# EAGLE board MOL-v2-0 (EAGLE 8.2.2)

Size 88.88 x 68.25 mm. Coordinates in mm from the lower left corner, seen from the top.
Outline: 0,0 88.88,0 88.88,68.25 0,68.25 0,0
Copper layers (1*16): Top 0.035559375mm / dielectric 1.501140625mm / Bottom 0.035559375mm
Design rules "typical_4pcb": minimum track width 10mil, minimum drill 15mil, track to track 6mil, track to pad 6mil, pad to pad 6mil, via to via 6mil, smd to smd 6mil, copper to edge 15mil, drill to drill 8mil, minimum pad ring 10mil, minimum via ring 8mil, stop-mask expansion 4mil, vias tented up to drill 0mil, thermal gap 10mil
Net classes: 2 Power: width 0.381 mm, clearance 0.279 mm; 3 Analog Sig: width 0.381 mm, clearance 0.279 mm

## Footprints (pad centres in the part's own frame; a part is rotated, then mirrored left to right if it is on the bottom)
2X5-SHROUDED_LOCK = drill 1.016 pad 1.88: 1 -1.397,5.08; 2 1.397,5.08; 3 -1.397,2.54; 4 1.397,2.54; 5 -1.397,0; 6 1.397,0; 7 -1.397,-2.54; 8 1.397,-2.54; 9 -1.397,-5.08; 10 1.397,-5.08
1X03_NO_SILK = drill 1.016 pad 1.524: 1 0,0; 2 2.54,0; 3 5.08,0
DIL18 = drill 0.813 long: 1 -10.16,-3.81; 2 -7.62,-3.81; 3 -5.08,-3.81; 4 -2.54,-3.81; 5 0,-3.81; 6 2.54,-3.81; 7 5.08,-3.81; 8 7.62,-3.81; 9 10.16,-3.81; 10 10.16,3.81; 11 7.62,3.81; 12 5.08,3.81; 13 2.54,3.81; 14 0,3.81; 15 -2.54,3.81; 16 -5.08,3.81; 17 -7.62,3.81; 18 -10.16,3.81
1X03_LOCK@1 = drill 1.016 pad 1.88: 1 0,0.127; 2 2.54,-0.127; 3 5.08,0.127
1X05_LOCK = drill 1.016 pad 1.88: 1 0,0.127; 2 2.54,-0.127; 3 5.08,0.127; 4 7.62,-0.127; 5 10.16,0.127
TRIM-PCB-9MM = drill 0.9 pad 1.778: 1 -2.54,-7.5; 2 0,-7.5; 3 2.54,-7.5 | drill 2.845 pad 4: 5 -4.8,0; M2 4.8,0
DCJACK_2MM_PTH = drill 2.8: GND 0,7.35; GNDBREAK 4.8,10.75 | drill 3.2: PWR 0,13.6
RESISTOR-NET-8P-DIL16 = drill 0.813 pad 1.422: A1 -8.89,-3.81; A2 -8.89,3.81; B1 -6.35,-3.81; B2 -6.35,3.81; C1 -3.81,-3.81; C2 -3.81,3.81; D1 -1.27,-3.81; D2 -1.27,3.81; E1 1.27,-3.81; E2 1.27,3.81; F1 3.81,-3.81; F2 3.81,3.81; G1 6.35,-3.81; G2 6.35,3.81; H1 8.89,-3.81; H2 8.89,3.81
TR2-SWITCH-MOMENTARY-LED = drill 0.8 pad 1.676: 1 2.54,-2.54; 2 2.54,2.54; 3 -2.54,-2.54; 4 -2.54,2.54; A 0,2.54; C 0,-2.54
T36 = drill 1: 0 -15.24,-5.08; 1 -12.7,-5.08; 2 -10.16,-5.08; 3 -7.62,-5.08; 3V3(1) 17.78,-5.08; 3V3(2) 27.94,0; 3V3(3) -12.7,10.16; 3V3(4) 40.64,5.08; 4 -5.08,-5.08; 5 -2.54,-5.08; 5V -11.43,-1.905; 6 0,-5.08; 7 2.54,-5.08; 8 5.08,-5.08; 9 7.62,-5.08; 10 10.16,-5.08; 11 12.7,-5.08; 12 15.24,-5.08; 13 15.24,10.16; 14 12.7,10.16; 15 10.16,10.16; 16 7.62,10.16; 17 5.08,10.16; 18 2.54,10.16; 19 0,10.16; 20 -2.54,10.16; 21 -5.08,10.16; 22 -7.62,10.16; 23 -10.16,10.16; 24 20.32,-5.08; 25 22.86,-5.08; 26 25.4,-5.08; 27 27.94,-5.08; 28 30.48,-5.08; 29 33.02,-5.08; 30 35.56,-5.08; 31 38.1,-5.08; 32 40.64,-5.08; 33 40.64,10.16; 34 38.1,10.16; 35 35.56,10.16; 36 33.02,10.16; 37 30.48,10.16; 38 27.94,10.16; 39 25.4,10.16; 40 20.32,2.54; 41 22.86,2.54; 42 25.4,2.54; 43 30.48,2.54; 44 33.02,2.54; 45 35.56,2.54; 46 38.1,2.54; 47 38.1,5.08; 48 35.56,5.08; 49 33.02,5.08; 50 30.48,5.08; 51 25.4,5.08; 52 22.86,5.08; 53 20.32,5.08; 54 5.08,5.08; 55 2.54,5.08; 56 0,5.08; 57 -2.54,5.08; A10 -7.62,7.62; A11 -5.08,7.62; AGND -15.24,10.16; AREF -10.16,7.62; D+ -6.35,-1.905; D- -8.89,-1.905; DAC0 22.86,10.16; DAC1 20.32,10.16; DC 2.54,2.54; DD 5.08,2.54; DE 0,2.54; G1 27.94,2.54; G2 17.78,10.16; G3 40.64,2.54; G4 -3.81,-1.905; G5 -1.27,-1.905; G6 -2.54,2.54; P 27.94,5.08; R 27.94,7.62; VBAT 27.94,-2.54; VIN -17.78,10.16; VUSB -15.24,7.62 | drill 1 square: G0 -17.78,-5.08

## Placement (x,y rotation side)
ACTUATORS  [2X5-SHROUDED_LOCK]  71.12,26.67 180 bottom
AN-IN-1  [1X03_NO_SILK]  86.23,9.27 90 bottom
AN-IN-2  [1X03_NO_SILK]  70.87,11.3 0 bottom
AN-IN-3  [1X03_NO_SILK]  46.74,11.3 0 bottom
AN-IN-4  [1X03_NO_SILK]  21.34,11.3 0 bottom
IC1  ULN2803  [DIL18]  26.67,39.37 0 bottom
IC2  ULN2803  [DIL18]  54.61,39.37 0 bottom
J1  Servo1  [1X03_LOCK@1]  82.55,37.72 90 bottom
J2  Servo2  [1X03_LOCK@1]  85.09,37.72 90 bottom
JOY1  [1X05_LOCK]  85.09,55.88 270 bottom
JOY2  [1X05_LOCK]  2.54,44.45 90 bottom
KNOB1  [TRIM-PCB-9MM]  7.24,5.08 180 top
KNOB2  [TRIM-PCB-9MM]  31.75,5.08 180 top
KNOB3  [TRIM-PCB-9MM]  55.88,5.08 180 top
KNOB4  [TRIM-PCB-9MM]  79.88,4.83 180 top
POWER-5V  [DCJACK_2MM_PTH]  91.44,21.59 270 bottom
RN1  330  [RESISTOR-NET-8P-DIL16]  27.94,50.8 0 bottom
RN2  330  [RESISTOR-NET-8P-DIL16]  53.34,50.8 0 bottom
S5  SW-LEDPTH  [TR2-SWITCH-MOMENTARY-LED]  19.94,5.08 0 top
S6  SW-LEDPTH  [TR2-SWITCH-MOMENTARY-LED]  44.45,5.08 0 top
S7  SW-LEDPTH  [TR2-SWITCH-MOMENTARY-LED]  68.58,5.08 0 top
S8  SW-LEDPTH  [TR2-SWITCH-MOMENTARY-LED]  82.55,31.75 0 top
STRIP1  [2X5-SHROUDED_LOCK]  8.89,45.72 0 bottom
STRIP2  [2X5-SHROUDED_LOCK]  76.2,62.23 90 bottom
STRIP3  [2X5-SHROUDED_LOCK]  54.61,62.23 90 bottom
STRIP4  [2X5-SHROUDED_LOCK]  33.02,62.23 90 bottom
STRIP5  [2X5-SHROUDED_LOCK]  11.43,62.23 90 bottom
STRIP6  [2X5-SHROUDED_LOCK]  74.93,46.99 180 bottom
U$2  TEENSY3_6--ALLPINS  [T36]  19.05,26.67 180 bottom

## Library data of the parts
ACTUATORS STRIP1-STRIP6 = SparkFun-Connectors; PROD_ID: CONN-08671; SF_ID: PRT-08506
AN-IN-1-AN-IN-4 J1 J2 JOY1 JOY2 = SparkFun-Connectors
IC1 IC2 = uln-udn
KNOB1-KNOB4 S5-S8 = Daniel
POWER-5V = adafruit
RN1 RN2 U$2 = CMU-ArtFab

## Nets
+3V3: ACTUATORS.9 AN-IN-1.1 AN-IN-2.1 AN-IN-3.1 AN-IN-4.1 JOY1.2 JOY2.2 KNOB1.1 KNOB2.1 KNOB3.1 KNOB4.1 STRIP1.9 STRIP2.9 STRIP3.9 STRIP4.9 STRIP5.9 STRIP6.9 U$2.3V3(1) U$2.3V3(2) U$2.3V3(3) U$2.3V3(4)
+5V [Power]: ACTUATORS.7 ACTUATORS.8 IC1.10 IC2.10 J1.2 J2.2 POWER-5V.PWR
AGND [Analog Sig]: AN-IN-1.3 AN-IN-2.3 AN-IN-3.3 AN-IN-4.3 JOY1.1 JOY2.1 KNOB1.3 KNOB2.3 KNOB3.3 KNOB4.3 STRIP1.8 STRIP2.8 STRIP3.8 STRIP4.8 STRIP5.8 STRIP6.8 U$2.AGND
AN1 [Analog Sig]: STRIP1.1 U$2.15
AN2 [Analog Sig]: STRIP1.2 U$2.16
AN3 [Analog Sig]: STRIP2.1 U$2.14
AN4 [Analog Sig]: STRIP2.2 U$2.33
AN5 [Analog Sig]: AN-IN-1.2 STRIP3.1 U$2.34
AN6 [Analog Sig]: AN-IN-2.2 STRIP3.2 U$2.35
AN7 [Analog Sig]: AN-IN-3.2 STRIP4.1 U$2.39
AN8 [Analog Sig]: AN-IN-4.2 STRIP4.2 U$2.36
AN9 [Analog Sig]: KNOB1.2 STRIP5.1 U$2.DAC0
AN10 [Analog Sig]: KNOB2.2 STRIP5.2 U$2.DAC1
AN11 [Analog Sig]: KNOB3.2 STRIP6.1 U$2.A10
AN12 [Analog Sig]: KNOB4.2 STRIP6.2 U$2.A11
B1: STRIP1.3 U$2.12
B2: STRIP1.4 U$2.11
B3: STRIP2.3 U$2.28
B4: STRIP2.4 U$2.27
B5: STRIP3.3 U$2.26
B6: STRIP3.4 U$2.25
B7: STRIP4.3 U$2.24
B8: STRIP4.4 U$2.42
B9: STRIP5.3 U$2.43
B10: STRIP5.4 U$2.44
B11: STRIP6.3 U$2.45
B12: STRIP6.4 U$2.46
B13: S5.1 U$2.52
B14: S6.1 U$2.51
B15: S7.1 U$2.53
B16: S8.1 U$2.54
GND: ACTUATORS.10 IC1.9 IC2.9 J1.1 J2.1 POWER-5V.GND S5.3 S6.3 S7.3 S8.3 STRIP1.10 STRIP2.10 STRIP3.10 STRIP4.10 STRIP5.10 STRIP6.10 U$2.G0 U$2.G1 U$2.G2 U$2.G3 U$2.G4 U$2.G5 U$2.G6
GNDBREAK: POWER-5V.GNDBREAK
JOYB1: JOY1.5 U$2.1
JOYB2: JOY2.5 U$2.0
JOYH1 [Analog Sig]: JOY1.3 U$2.20
JOYH2 [Analog Sig]: JOY2.3 U$2.18
JOYV1 [Analog Sig]: JOY1.4 U$2.19
JOYV2 [Analog Sig]: JOY2.4 U$2.17
LED1: STRIP1.7 U$2.47
LED2: STRIP2.7 U$2.48
LED3: STRIP3.7 U$2.55
LED4: STRIP4.7 U$2.56
LED5: STRIP5.7 U$2.57
LED6: STRIP6.7 U$2.13
M_AIN: ACTUATORS.2 U$2.40
M_BIN: ACTUATORS.4 U$2.41
M_PWMA: ACTUATORS.1 U$2.29
M_PWMB: ACTUATORS.3 U$2.30
N$11: IC1.18 RN1.A1
N$12: IC1.17 RN1.B1
N$13: IC1.16 RN1.C1
N$14: IC1.15 RN1.D1
N$15: IC1.14 RN1.E1
N$16: IC1.13 RN1.F1
N$17: IC1.12 RN1.G1
N$18: IC1.11 RN1.H1
N$19: IC2.18 RN2.A1
N$20: IC2.17 RN2.B1
N$21: IC2.16 RN2.C1
N$22: IC2.15 RN2.D1
N$23: IC2.14 RN2.E1
N$24: IC2.12 RN2.G1
N$25: IC2.11 RN2.H1
N$26: IC2.13 RN2.F1
PWM1: IC1.8 U$2.2
PWM2: IC1.7 U$2.3
PWM3: IC1.6 U$2.4
PWM4: IC1.5 U$2.5
PWM5: IC1.4 U$2.6
PWM6: IC1.3 U$2.7
PWM7: IC1.2 U$2.8
PWM8: IC1.1 U$2.23
PWM9: IC2.8 U$2.21
PWM10: IC2.7 U$2.22
PWM11: IC2.6 U$2.31
PWM12: IC2.5 U$2.32
PWM13: IC2.4
PWM14: IC2.3
PWM15: IC2.2
PWM16: IC2.1
PWM_1: RN1.H2 STRIP1.5
PWM_2: RN1.G2 STRIP1.6
PWM_3: RN1.F2 STRIP2.5
PWM_4: RN1.E2 STRIP2.6
PWM_5: RN1.D2 STRIP3.5
PWM_6: RN1.C2 STRIP3.6
PWM_7: RN1.B2 STRIP4.5
PWM_8: RN1.A2 STRIP4.6
PWM_9: RN2.H2 STRIP5.5
PWM_10: RN2.G2 STRIP5.6
PWM_11: RN2.F2 STRIP6.5
PWM_12: RN2.E2 STRIP6.6
PWM_13: RN2.D2 S5.C U$2.37
PWM_14: RN2.C2 S6.C U$2.38
PWM_15: RN2.B2 S7.C U$2.49
PWM_16: RN2.A2 S8.C U$2.50
S1: ACTUATORS.5 J1.3 U$2.9
S2: ACTUATORS.6 J2.3 U$2.10
V+: S5.A S6.A S7.A S8.A

## Tracks (layer width: path | path; a pad name or v marks a point on that pad's centre or on a via)
+3V3  (20 unrouted)
+5V  (6 unrouted)
AGND  (16 unrouted)
AN1  (1 unrouted)
AN2  (1 unrouted)
AN3  (1 unrouted)
AN4  (1 unrouted)
AN5  (2 unrouted)
AN6  (2 unrouted)
AN7  (2 unrouted)
AN8  (2 unrouted)
AN9  (2 unrouted)
AN10  (2 unrouted)
AN11  (2 unrouted)
AN12  (2 unrouted)
B1  (1 unrouted)
B2  (1 unrouted)
B3  (1 unrouted)
B4  (1 unrouted)
B5  (1 unrouted)
B6  (1 unrouted)
B7  (1 unrouted)
B8  (1 unrouted)
B9  (1 unrouted)
B10  (1 unrouted)
B11  (1 unrouted)
B12  (1 unrouted)
B13  (1 unrouted)
B14  (1 unrouted)
B15  (1 unrouted)
B16  (1 unrouted)
GND  (22 unrouted)
JOYB1  (1 unrouted)
JOYB2  (1 unrouted)
JOYH1  (1 unrouted)
JOYH2  (1 unrouted)
JOYV1  (1 unrouted)
JOYV2  (1 unrouted)
LED1  (1 unrouted)
LED2  (1 unrouted)
LED3  (1 unrouted)
LED4  (1 unrouted)
LED5  (1 unrouted)
LED6  (1 unrouted)
M_AIN  (1 unrouted)
M_BIN  (1 unrouted)
M_PWMA  (1 unrouted)
M_PWMB  (1 unrouted)
N$11  (1 unrouted)
N$12  (1 unrouted)
N$13  (1 unrouted)
N$14  (1 unrouted)
N$15  (1 unrouted)
N$16  (1 unrouted)
N$17  (1 unrouted)
N$18  (1 unrouted)
N$19  (1 unrouted)
N$20  (1 unrouted)
N$21  (1 unrouted)
N$22  (1 unrouted)
N$23  (1 unrouted)
N$24  (1 unrouted)
N$25  (1 unrouted)
N$26  (1 unrouted)
PWM1  (1 unrouted)
PWM2  (1 unrouted)
PWM3  (1 unrouted)
PWM4  (1 unrouted)
PWM5  (1 unrouted)
PWM6  (1 unrouted)
PWM7  (1 unrouted)
PWM8  (1 unrouted)
PWM9  (1 unrouted)
PWM10  (1 unrouted)
PWM11  (1 unrouted)
PWM12  (1 unrouted)
PWM_1  (1 unrouted)
PWM_2  (1 unrouted)
PWM_3  (1 unrouted)
PWM_4  (1 unrouted)
PWM_5  (1 unrouted)
PWM_6  (1 unrouted)
PWM_7  (1 unrouted)
PWM_8  (1 unrouted)
PWM_9  (1 unrouted)
PWM_10  (1 unrouted)
PWM_11  (1 unrouted)
PWM_12  (1 unrouted)
PWM_13  (2 unrouted)
PWM_14  (2 unrouted)
PWM_15  (2 unrouted)
PWM_16  (2 unrouted)
S1  (2 unrouted)
S2  (2 unrouted)
V+  (3 unrouted)